# Altium PCB GPS spacer.PcbDoc
Units mil, origin at the board's own origin, x right, y up, seen from the top; angles counter-clockwise.
Board outline 432.4 x 260.8 mil, 2 copper layers (Top Layer, Bottom Layer); 2 components, 4 nets, 4 pads, 0 vias.
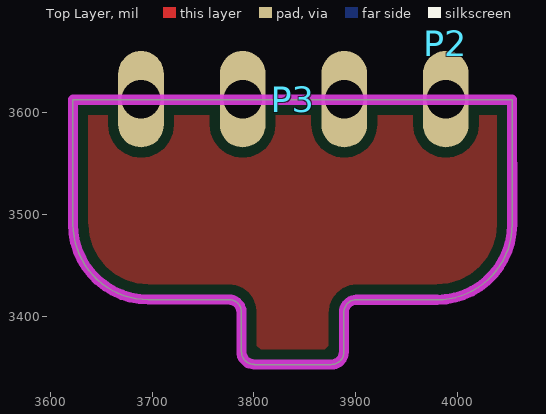
[diagram p0: Top Layer view]
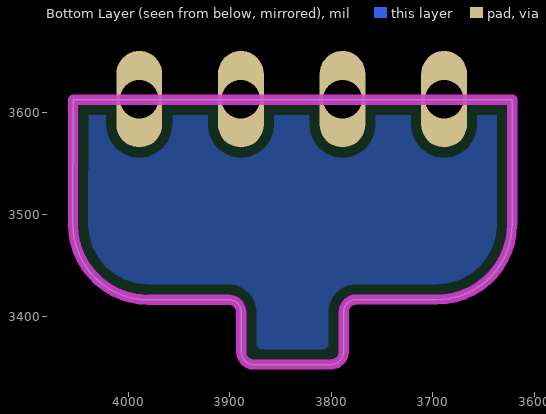
[diagram p1: Bottom Layer view, seen from below]

## Layer stack, top to bottom
Top Layer: signal copper 1.4
Dielectric: dielectric 12.6, FR-4, Dk 4.8
Bottom Layer: signal copper 1.4

## Board outline
3787.79,3364.69 3787.79,3404.05 ccw(c3775.48,3403.92) 3775.35,3416.22 3775.38,3416.19 3696.31,3416.19 cw(c3696.31,3490.5) 3622,3490.5 3621.93,3490.5 3621.93,3613 4054,3613 4054.17,3613 4054.34,3490.31 4054.31,3490.31 cw(c3980,3490.31) 3980,3416 3900.93,3416 3901.07,3416.04 ccw(c3900.93,3403.73) 3888.63,3403.87 3888.63,3364.5 3888.6,3364.5 cw(c3876.29,3364.64) 3876.16,3352.33 3876.16,3352.2 3800.26,3352.2 3800.26,3352.52 cw(c3800.12,3364.82)

## Design rules (kind name [scope] priority, off if disabled: settings)
Clearance [All] p1: gap=10
PolygonConnect [All] p1: connectstyle=Relief reliefconductorwidth=10 reliefentries=4 polygonreliefangle="90 Angle"
RoutingVias [All] p1: holewidth=28 width=50 viastyle="Through Hole" minholewidth=28 minwidth=50 maxholewidth=28 maxwidth=50
SilkscreenOverComponentPads [All] p1: minsilkscreentomaskgap=10
SolderMaskExpansion [All] p1: expansion=4
Width [All] p1: maxlimit=30 minlimit=10 preferedwidth=20 minimp=50.000000 maximp=50.000000 favimp=50.000000
27 further rules are at their usual default settings.

## Components (designator, comment, footprint, x,y, rotation, side; value= is the part's Value field where it differs from the comment)
P2 "Header 4" HDR1X4#1 3989,3668.5 r180 top
P3 "Header 4" HDR1X4#2 3989,3613.5 r180 top (schematic designator P2)

## Footprints (in the part's own frame and the unit in brackets; to place one, negate y for a bottom-side part, rotate by r counter-clockwise, add the part's x,y. Pads: shape width x height; smd on the part's side, far side on the other; paste and mask are expansions set on the pad)
HDR1X4#1 [mil] "Connector; Header; 4 Position"
HDR1X4#2 [mil] "Connector; Header; 4 Position"
  oval 45x95 hole 38: 1(0,0) 2(100,0) 3(200,0) 4(300,0)

## Part data
P2 P3: "Header, 4-Pin"

## Nets (pads, with @x,y where several pads share a name; then routed paths per layer and width w, separated by ;. In a path a pad name is that pad's centre, name@x,y a point inside that pad or via, vN(x,y) a via of type N, cw(c..) or ccw(c..) an arc to the next point about the centre after c; other vN are vias at no path point)
1: P3.1
2: P3.2
3: P3.3
4: P3.4

## Polygon pours and split planes (outlines as drawn)
no net on Top Layer "Top Layer-No Net" (solid): 3696.31,3416.09 3755.81,3416.09 3755.81,3416.19 cw(c3756.16,3384.45) 3787.9,3384.8 3788.4,3384.8 ccw(c3822.6,3386.4) 3824.2,3352.2 3852.03,3352.2 3852.11,3352.11 ccw(c3853.71,3386.31) 3887.91,3384.71 3888.41,3384.71 cw(c3920.15,3384.36) 3920.5,3416.1 3920.5,3416 3980,3416 ccw(c3980,3490.31) 4054.31,3490.31 4054.34,3490.31 4054.17,3613 4054,3613 3621.93,3613 3621.93,3490.5 3622,3490.5 ccw(c3696.31,3490.5)
no net on Bottom Layer "Top Layer-No Net" (solid, pour order 5): 3696.31,3416.09 3755.81,3416.09 3755.81,3416.19 cw(c3756.16,3384.45) 3787.9,3384.8 3788.4,3384.8 ccw(c3822.6,3386.4) 3824.2,3352.2 3852.03,3352.2 3852.11,3352.11 ccw(c3853.71,3386.31) 3887.91,3384.71 3888.41,3384.71 cw(c3920.15,3384.36) 3920.5,3416.1 3920.5,3416 3980,3416 ccw(c3980,3490.31) 4054.31,3490.31 4054.34,3490.31 4054.17,3613 4054,3613 3621.93,3613 3621.93,3490.5 3622,3490.5 ccw(c3696.31,3490.5)

## Keep-outs
Keep-Out Layer:
  lines w10: 3621.93,3490.5 3621.93,3613 4054,3613 ; 3622,3490.5 ccw(c3696.31,3490.5) 3696.31,3416.19 3775.38,3416.19 ; 3775.35,3416.22 cw(c3775.48,3403.92) 3787.79,3404.05 3787.79,3364.69 ccw(c3800.12,3364.82) 3800.26,3352.52 ; 3800.26,3352.2 3876.16,3352.2 ; 3876.16,3352.33 ccw(c3876.29,3364.64) 3888.6,3364.5 ; 3888.63,3364.5 3888.63,3403.87 cw(c3900.93,3403.73) 3901.07,3416.04 ; 3900.93,3416 3980,3416 ccw(c3980,3490.31) 4054.31,3490.31 ; 4054.17,3613 4054.34,3490.31

## Silkscreen, mask and mechanical layers (free items; w line width, h text height)
Top Solder:
  rectangle: 3686,3420 4000,3505
Bottom Solder:
  rectangle: 3686,3420 4000,3505